# EAGLE board ReceiverBoard (EAGLE 9.4.2)
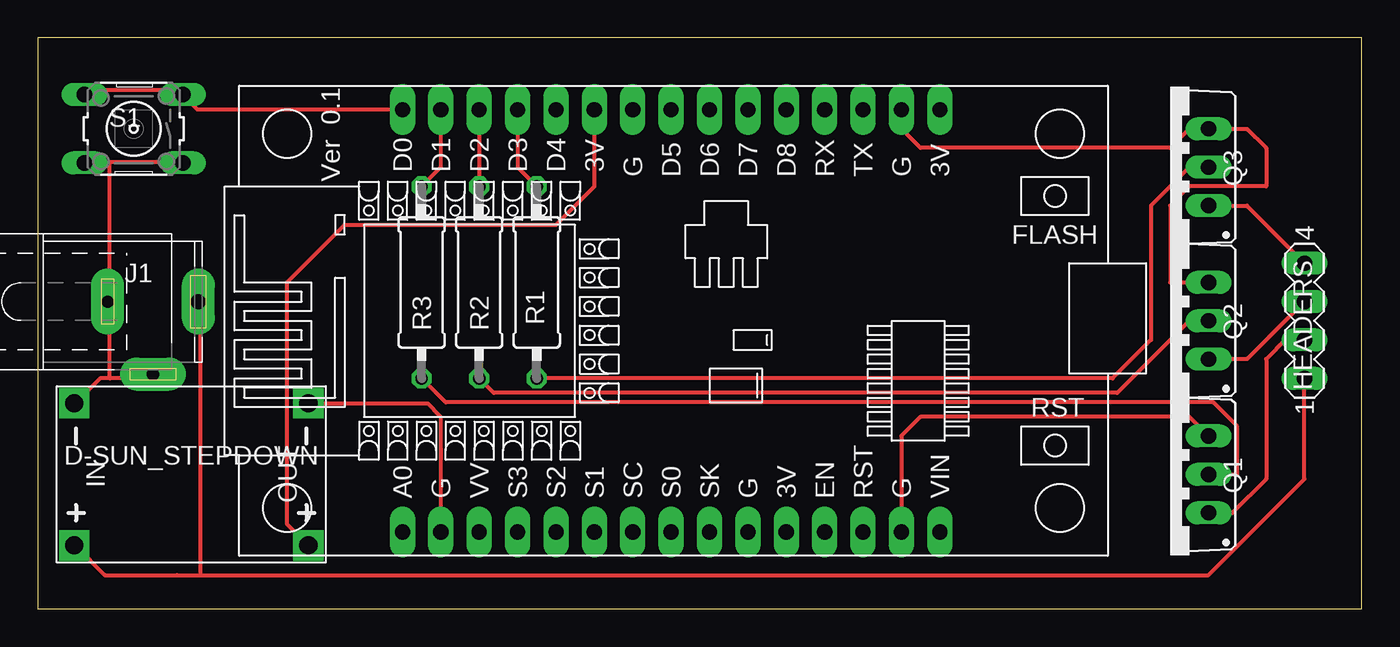
[diagram p0: board, top side]

Size 87.61 x 37.77 mm. Coordinates in mm from the lower left corner, seen from the top.
Outline: 0,0 87.61,0 87.61,37.77 0,37.77 0,0
Copper layers (1*16): Top 0.035mm / dielectric 1.5mm / Bottom 0.035mm
Design rules "default *": minimum track width 10mil, minimum drill 0.35mm, track to track 8mil, track to pad 6mil, pad to pad 6mil, via to via 6mil, smd to smd 6mil, copper to edge 40mil, drill to drill 6mil, minimum pad ring 10mil, minimum via ring 8mil, stop-mask expansion 4mil, vias tented up to drill 0mil, thermal gap 10mil

## Footprints (pad centres in the part's own frame; a part is rotated, then mirrored left to right if it is on the bottom)
DC-DC-STEP-DOWN-MP2307 = drill 1.2 pad 2 square: IN+ -7.747,-4.699; IN- -7.747,4.699; OUT+ 7.747,-4.699; OUT- 7.747,4.699
NODEMCU = drill 1 pad 1.676 long: 1 -13.97,17.78; 2 -13.97,15.24; 3 -13.97,12.7; 4 -13.97,10.16; 5 -13.97,7.62; 6 -13.97,5.08; 7 -13.97,2.54; 8 -13.97,0; 9 -13.97,-2.54; 10 -13.97,-5.08; 11 -13.97,-7.62; 12 -13.97,-10.16; 13 -13.97,-12.7; 14 -13.97,-15.24; 15 -13.97,-17.78; 16 13.97,-17.78; 17 13.97,-15.24; 18 13.97,-12.7; 19 13.97,-10.16; 20 13.97,-7.62; 21 13.97,-5.08; 22 13.97,-2.54; 23 13.97,0; 24 13.97,2.54; 25 13.97,5.08; 26 13.97,7.62; 27 13.97,10.16; 28 13.97,12.7; 29 13.97,15.24; 30 13.97,17.78
MA04-1 = drill 1.016 long: 1 -3.81,0; 2 -1.27,0; 3 1.27,0; 4 3.81,0
SPC4078 = drill 0.8 pad 2.184 long: 1 -3,0; 2 0,-4.8 | drill 1 pad 2.184 long: 3 3,0
TO220BV = drill 1.016 long: D 0,-2.54; G -2.54,-2.54; S 2.54,-2.54
0309/12 = drill 0.813 octagon: 1 -6.35,0; 2 6.35,0
B3F-10XX = drill 1.016 long: 1 -3.251,2.261; 2 3.251,2.261; 3 -3.251,-2.261; 4 3.251,-2.261

## Placement (x,y rotation side)
D-SUN_STEPDOWN  DC-DC-STEP-DOWN-MP2307  [DC-DC-STEP-DOWN-MP2307]  10.16,8.89 0 top
ESP2866  NODEMCU  [NODEMCU]  41.91,19.05 90 top
HEADERS  [MA04-1]  83.82,19.05 90 top
J1  [SPC4078]  7.62,20.32 0 top
Q1  IRL540N  [TO220BV]  74.93,8.89 90 top
Q2  IRL540N  [TO220BV]  74.93,19.05 90 top
Q3  IRL540N  [TO220BV]  74.93,29.21 90 top
R1  1k  [0309/12]  33.02,21.59 270 top
R2  1k  [0309/12]  29.21,21.59 270 top
R3  1k  [0309/12]  25.4,21.59 270 top
S1  [B3F-10XX]  6.35,31.75 180 top

## Library data of the parts
D-SUN_STEPDOWN = diy-modules
ESP2866 = nodemcu
HEADERS = con-lstb; OC_FARNELL: unknown; OC_NEWARK: unknown
J1 = con-jack; OC_FARNELL: unknown; OC_NEWARK: unknown
Q1-Q3 = transistor-power
R1-R3 = rcl; SPICEPREFIX: R
S1 = switch-omron; MPN: B3F-1000; OC_FARNELL: 176432; OC_NEWARK: 36M3542

## Nets
+12V: D-SUN_STEPDOWN.IN+ HEADERS.1 J1.3
GND: ESP2866.14 Q1.S
LED_B: Q3.D R1.2
LED_G: Q2.D R2.2
LED_R: Q1.D R3.2
N$1: HEADERS.2 Q1.G
N$2: HEADERS.3 Q2.G
N$3: HEADERS.4 Q3.G
N$4: ESP2866.29 R3.1
N$5: ESP2866.28 R2.1
N$6: ESP2866.27 R1.1
N$7: S1.3 S1.4
S$1: ESP2866.17 Q3.S
S$2: D-SUN_STEPDOWN.OUT- ESP2866.2
S$3: D-SUN_STEPDOWN.IN- J1.1 J1.2 S1.1 S1.2
S$4: D-SUN_STEPDOWN.OUT+

## Tracks (layer width: path | path; a pad name or v marks a point on that pad's centre or on a via)
+12V
  Top 0.254: HEADERS.1 83.82,8.57 77.47,2.22 9.21,2.22 | D-SUN_STEPDOWN.IN+ 2.54,4.13 4.45,2.22 10.79,2.22 10.79,20.32 J1.3
GND
  Top 0.254: Q1.S 76.2,12.7 58.42,12.7 57.15,11.43 ESP2866.14
LED_B
  Top 0.254: Q3.D 76.2,29.21 73.66,26.67 73.66,17.78 71.12,15.24 R1.2
LED_G
  Top 0.254: R2.2 30.16,14.29 71.44,14.29 76.2,19.05 Q2.D
LED_R
  Top 0.254: R3.2 26.99,13.65 77.79,13.65 79.38,12.06 79.38,8.89 Q1.D
N$1
  Top 0.254: Q1.G 79.06,6.35 81.28,8.57 81.28,16.51 82.55,17.78 HEADERS.2
N$2
  Top 0.254: HEADERS.3 80.01,16.51 Q2.G
N$3
  Top 0.254: Q3.G 80.01,26.67 HEADERS.4
N$4
  Top 0.254: R3.1 26.67,29.21 ESP2866.29
N$5
  Top 0.254: ESP2866.28 R2.1
N$6
  Top 0.254: R1.1 31.75,29.21 ESP2866.27
N$7
  Top 0.254: S1.4 3.17,34.29 9.53,34.29 S1.3 10.59,33.02 24.13,33.02
S$1
  Top 0.254: ESP2866.17 57.15,31.75 58.42,30.48 74.93,30.48 76.2,31.75 Q3.S 80.01,31.75 81.28,30.48 81.28,27.94 76.2,27.94 74.93,26.67 74.93,21.59 77.47,21.59
S$2
  Top 0.254: D-SUN_STEPDOWN.OUT- 25.78,13.59 26.67,12.7 ESP2866.2
S$3
  Top 0.254: 9.84,29.53 S1.1 9.53,29.53 4.76,29.53 | S1.2 3.17,29.53 4.76,29.53 | 4.76,20.32 4.76,29.53 | 4.76,20.32 J1.1 | J1.2 7.62,15.24 4.76,15.24 | 4.76,15.24 4.76,20.32 | 4.76,15.24 4.13,15.24 2.54,13.65 D-SUN_STEPDOWN.IN-
S$4
  Top 0.254: 17.78,4.45 D-SUN_STEPDOWN.OUT+ 16.51,5.59 16.51,21.59 20.32,25.4 34.29,25.4 36.83,27.94 36.83,33.02

## Text on the board
tValues: ESP8266 NodeMCU v3